# Altium PCB Copy of PCB1.PcbDoc
Units mil, origin at the board's own origin, x right, y up, seen from the top; angles counter-clockwise.
Board outline 3542.5 x 2310 mil, 2 copper layers (Top Layer, Bottom Layer); 13 components, 12 nets, 64 pads, 2 vias.
Unrouted connection lines stored in the file: 1.
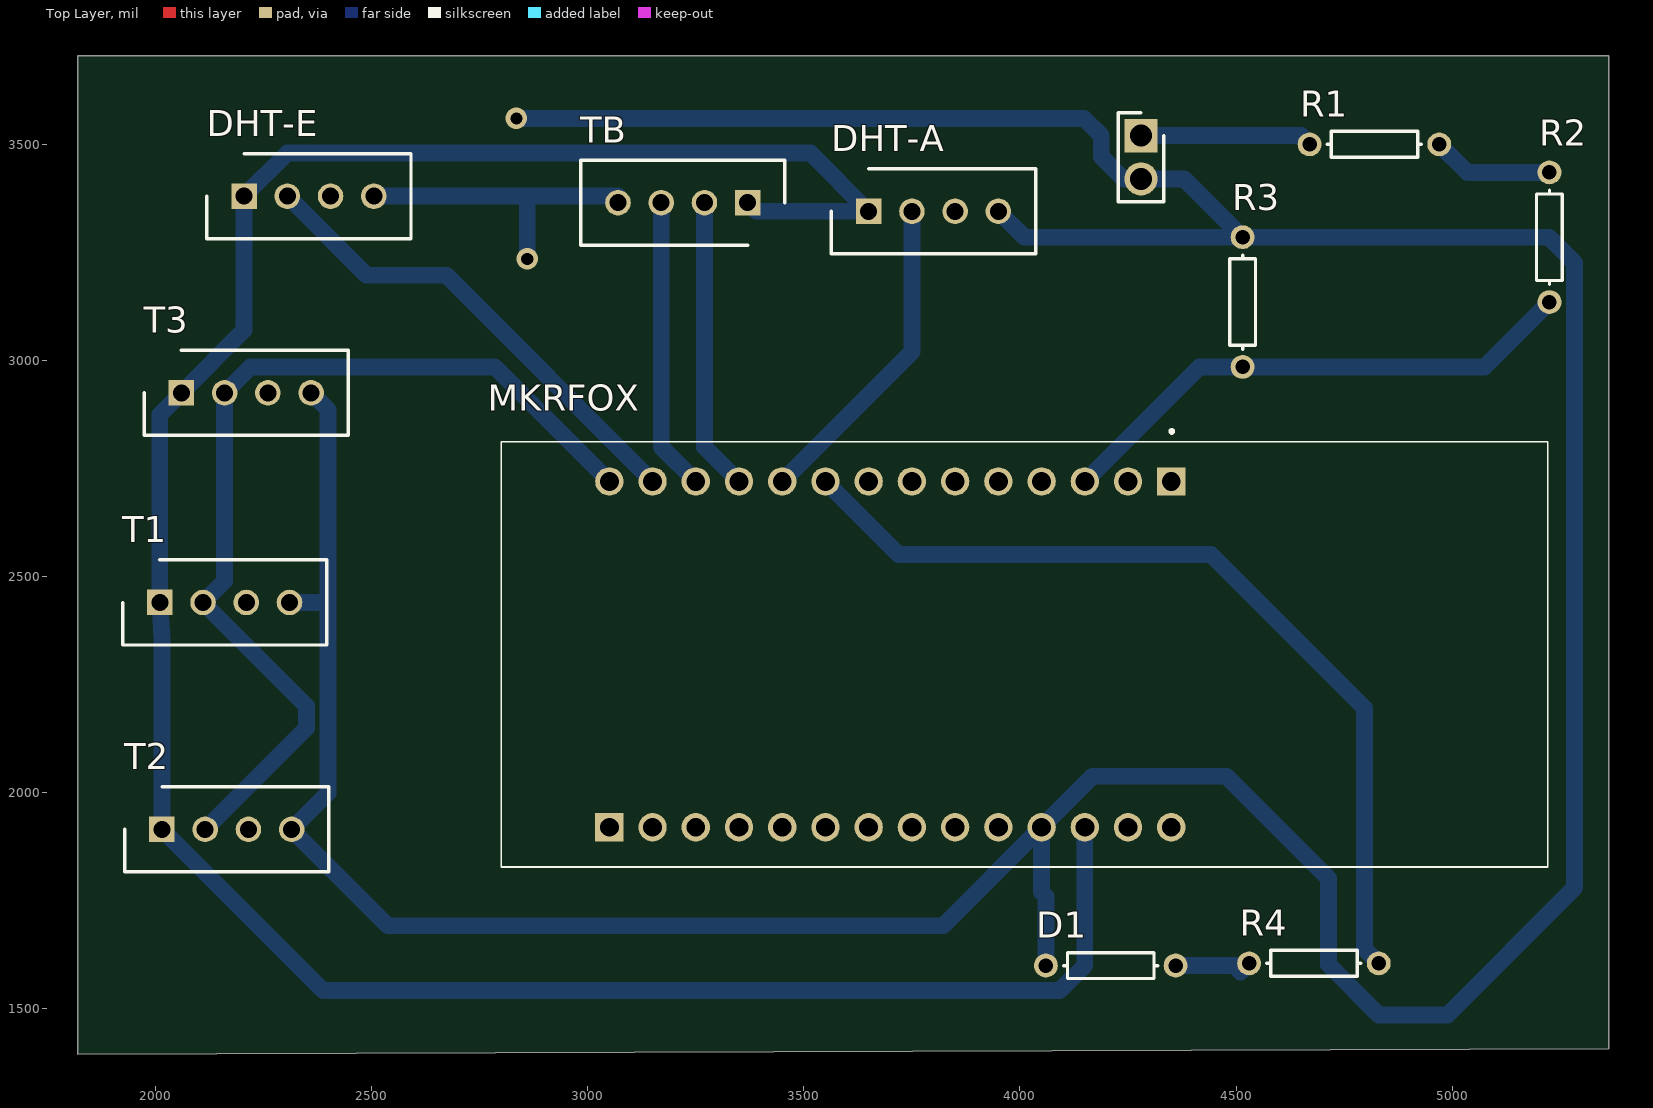
[diagram p0: Top Layer view]
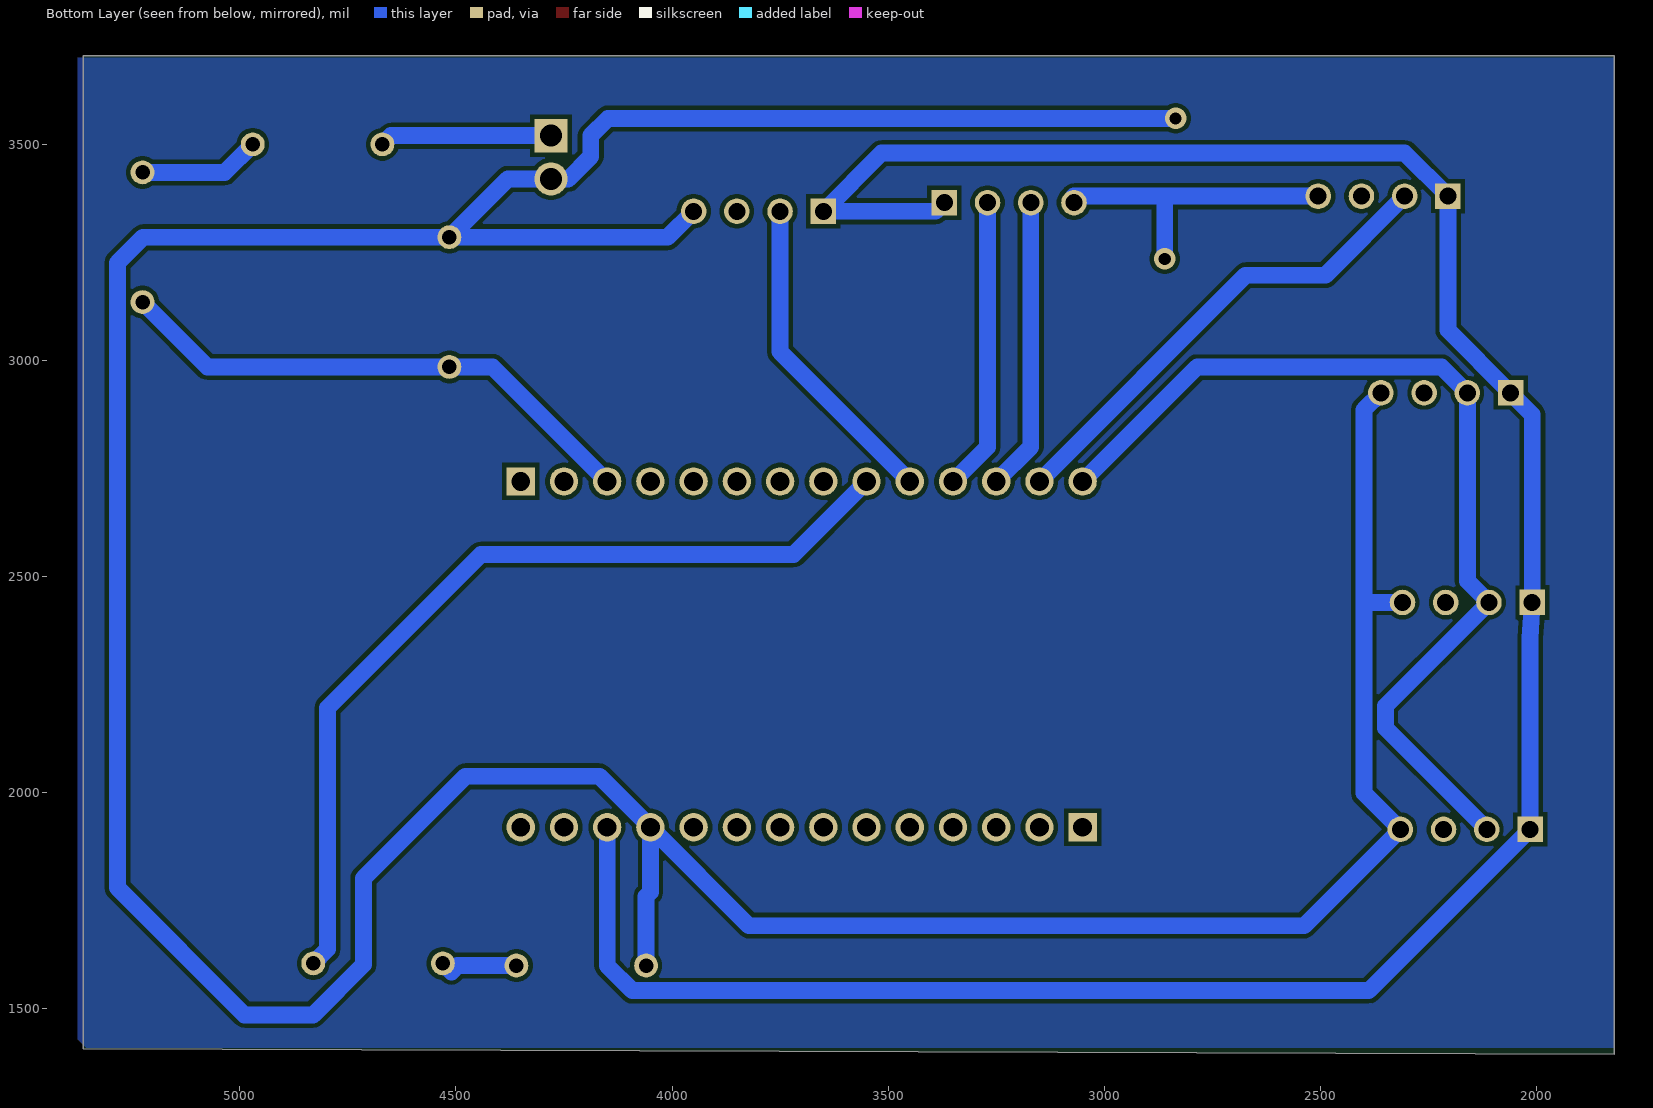
[diagram p1: Bottom Layer view, seen from below]

## Layer stack, top to bottom
Top Solder: solder mask 0.4, Solder Resist, Dk 3.5
Top Layer: signal copper 1.4
Dielectric 1: dielectric 12.6, FR-4, Dk 4.8
Bottom Layer: signal copper 1.4
Bottom Solder: solder mask 0.4, Solder Resist, Dk 3.5

## Board outline
1820,1395 5362.5,1407.5 5362.5,3705 1820,3705

## Design rules (kind name [scope] priority, off if disabled: settings)
Clearance [All] p1: gap=10 ignorepadtopadclearanceinfootprint=FALSE except(0: Arc-Hole Track-Hole SMDPad-Hole THPad-Hole Via-Hole Fill-Hole Poly-Hole Region-Hole Text-Hole)
PolygonConnect [All] p1: connectstyle=Relief reliefconductorwidth=10 reliefentries=4 polygonreliefangle="90 Angle" airgapwidth=10
RoomDefinition Schema-ruche-v1 [InComponentClass('Schema-ruche-v1')] p1: confinementstyle=ConfineIn formatcopy=TRUE lockcomponents=FALSE outline 1815,1400 5365,1400 5365,3700 1815,3700
RoutingLayers [All] p1: top layer_v5=FALSE bottom layer_v5=TRUE
RoutingVias [All] p1: holewidth=28 width=50 viastyle="Through Hole" minholewidth=28 minwidth=50 maxholewidth=28 maxwidth=50
SolderMaskExpansion [All] p1: expansion=4 istentingtop=FALSE
Width [All] p1: maxlimit=39.3 minlimit=10 preferedwidth=39 toplayer_maxwidth=10 toplayer_prefwidth=10 bottomlayer_minwidth=16 minimp=50.000000 maximp=50.000000 favimp=50.000000
29 further rules are at their usual default settings.

## Classes and differential pairs
component class Schema-ruche-v1: D1 DHT-A DHT-E MKRFOX R1 R2 R3 R4 T1 T2 T3 TB

## Components (designator, comment, footprint, x,y, rotation, side; value= is the part's Value field where it differs from the comment)
"Connector Battery" "61300211121" HDRV2W110P0X254_1X2_508X254X854P 4280,3520 r270 top
D1 "Res1" AXIAL-0.3 4210,1600 r0 top value=1K
DHT-A "101020011" HDRV4W80P0X254_1X4_1200X500X1550P 3650,3345 r0 top
DHT-E "101020011" HDRV4W80P0X254_1X4_1200X500X1550P 2205,3380 r0 top
MKRFOX "ABX00012" ABX00012 4010.63,2320 r180 top
R1 "Res1" AXIAL-0.3 4820,3500 r180 top value=1K
R2 "Res1" AXIAL-0.3 5225,3285 r90 top value=1K
R3 "Res1" AXIAL-0.3 4515,3135 r270 top value=1K
R4 "Res1" AXIAL-0.3 4680,1605 r180 top value=1K
T1 "101020011" HDRV4W80P0X254_1X4_1200X500X1550P 2010,2440 r0 top
T2 "101020011" HDRV4W80P0X254_1X4_1200X500X1550P 2015,1915 r0 top
T3 "101020011" HDRV4W80P0X254_1X4_1200X500X1550P 2060,2925 r0 top
TB "101020011" HDRV4W80P0X254_1X4_1200X500X1550P 3370,3365 r180 top

## Footprints (in the part's own frame and the unit in brackets; to place one, negate y for a bottom-side part, rotate by r counter-clockwise, add the part's x,y. Pads: shape width x height; smd on the part's side, far side on the other; paste and mask are expansions set on the pad)
ABX00012 [mm]
  rect 1.665x1.665 hole 1.11: 1(-8.62,-10.16) 15(24.4,10.16)
  round 1.665 hole 1.11: 2(-6.08,-10.16) 3(-3.54,-10.16) 4(-1,-10.16) 5(1.54,-10.16) 6(4.08,-10.16) 7(6.62,-10.16) 8(9.16,-10.16) 9(11.7,-10.16) 10(14.24,-10.16) 11(16.78,-10.16) 12(19.32,-10.16) 13(21.86,-10.16) 14(24.4,-10.16) 16(21.86,10.16) 17(19.32,10.16) 18(16.78,10.16) 19(14.24,10.16) 20(11.7,10.16) 21(9.16,10.16) 22(6.62,10.16) 23(4.08,10.16) 24(1.54,10.16) 25(-1,10.16) 26(-3.54,10.16) 27(-6.08,10.16) 28(-8.62,10.16)
  silkscreen extent -30.75,-13.2 30.75,12.5, body extent -30.75,-12.5 30.75,12.5, height 10.1
AXIAL-0.3 [mm] "Axial Device, Thru-Hole; 2 Leads; 0.3 in Pin Spacing"
  round 1.4 hole 0.85: 1(-3.81,0) 2(3.81,0)
  silkscreen extent -2.77,-0.76 2.77,0.76
HDRV2W110P0X254_1X2_508X254X854P [mm]
  rect 1.95x1.95 hole 1.3: 1(0,0)
  round 1.95 hole 1.3: 2(2.54,0)
  silkscreen extent -1.34,-1.34 3.88,1.34, body extent -1.27,-1.27 3.81,1.27, height 8.54
HDRV4W80P0X254_1X4_1200X500X1550P [mm]
  rect 1.5x1.5 hole 1: 1(0,0)
  round 1.5 hole 1: 2(2.54,0) 3(5.08,0) 4(7.62,0)
  silkscreen extent -2.19,-2.5 9.81,2.5

## Part data
"Connector Battery": "Connector", Manufacturer_Name="Wurth Elektronik", Mouser Part Number=710-61300211121, Datasheet Link=https://componentsearchengine.com/Datasheets/2/61300211121.pdf, Height=8.54mm, Manufacturer_Part_Number=61300211121, Mouser Price/Stock=https://www.mouser.co.uk/ProductDetail/Wurth-Elektronik/61300211121?qs=t4813l51qx%252B1A5GYDQxPlw%3D%3D
D1 R1 R2 R3 R4: "Resistor", LatestRevisionDate=17-Jul-2002, LatestRevisionNote="Re-released for DXP Platform.", PackageDescription="Axial Device, Thru-Hole; 2 Leads; 0.3 in Pin Spacing", PackageReference=AXIAL-0.3, Published=8-Jun-2000, Publisher="Altium Limited"
DHT-A DHT-E T1 T2 T3 TB: "Integrated Circuit", Manufacturer_Name="Seeed Studio", Mouser Part Number=713-101020011, Arrow Part Number=101020011, Arrow Price/Stock=https://www.arrow.com/en/products/101020011/seeed-technology-limited, Datasheet Link=https://componentsearchengine.com/Datasheets/1/101020011.pdf, Height=15.5mm, Manufacturer_Part_Number=101020011, Mouser Price/Stock=https://www.mouser.co.uk/ProductDetail/Seeed-Studio/101020011?qs=1%252B9yuXKSi8Dq%252B99bte6U5Q%3D%3D
MKRFOX: "Undefined or Miscellaneous", Manufacturer_Name=Arduino, Mouser Part Number=782-ABX00012, Arrow Part Number=ABX00012, Arrow Price/Stock=https://www.arrow.com/en/products/abx00012/arduino-corporation?region=nac, Datasheet Link=http://media.digikey.com/pdf/Data%20Sheets/Arduino%20PDFs/ABX00012_Web.pdf, Height=10mm, Manufacturer_Part_Number=ABX00012, Mouser Price/Stock=https://www.mouser.co.uk/ProductDetail/Arduino/ABX00012?qs=5aG0NVq1C4yoL%2F5lAzCrfA%3D%3D

## Via types
v1: diameter 50, hole 28, Top Layer to Bottom Layer, 2 vias

## Nets (pads, with @x,y where several pads share a name; then routed paths per layer and width w, separated by ;. In a path a pad name is that pad's centre, name@x,y a point inside that pad or via, vN(x,y) a via of type N, cw(c..) or ccw(c..) an arc to the next point about the centre after c; other vN are vias at no path point)
+Battery: "Connector Battery.1" R1.2 | length 398.3
  Bottom Layer w39: 4280,3520 4650,3520 R1.2
Bal-CLK: MKRFOX.12 TB.3 | length 678.1
  Bottom Layer w39: TB.3 3170,2800 MKRFOX.12
Bal-DATA: MKRFOX.11 TB.2 | length 678.1
  Bottom Layer w39: TB.2 3270,2800 MKRFOX.11
DHT-A: DHT-A.2 MKRFOX.10 | length 749.3
  Bottom Layer w39: MKRFOX.10 3750,3020 DHT-A.2
DHT-E: DHT-E.2 MKRFOX.13 | length 1118.4
  Bottom Layer w39: DHT-E.2 2488,3197 2673,3197 MKRFOX.13
GND: "Connector Battery.2" D1.1 DHT-A.4 DHT-E.4 MKRFOX.25 R3.1 T1.4 T2.4 T3.4 TB.4 | length 10515.7
  Bottom Layer w39: T1.4 2399,2440 ; T3.4 2399,2886 2399,2440 ; DHT-E.4 2860,3380 ; v1@2840,3560 4148,3560 4188,3520 4188,3472 4240,3420 4280,3420 4380,3420 R3.1 ; v1(2860,3235) 2860,3380 ; TB.4 3070,3380 2860,3380 ; DHT-A.4 4010,3285 R3.1 ; D1.1 4060,1760 4050,1770 MKRFOX.25 ; 2399,2440 2399,1999 T2.4 2538,1692 3822,1692 MKRFOX.25 ; MKRFOX.25 4168,2038 4478,2038 4714,1802 4714,1602 4830,1486 4989,1486 5283,1780 5283,3226 5224,3285 R3.1
  other v1: 2835,3560
Led_pow: MKRFOX.9 R4.1 | length 2068.7
  Bottom Layer w39: MKRFOX.9 3719,2551 4442,2551 4797,2196 4797,1638 R4.1
NetD1_2: D1.2 R4.2 | length 184.1
  Bottom Layer w39: D1.2 4496,1600 4510.5,1585.5 R4.2
NetR1_1: R1.1 R2.2 | length 281.9
  Bottom Layer w39: R1.1 5035,3435 R2.2
oneWire: MKRFOX.14 T1.2 T2.2 T3.2 | length 2251.5
  Bottom Layer w39: T2.2 2349.29,2149.29 2349.29,2200.71 T1.2 2160,2490 T3.2 2220,2985 2785,2985 MKRFOX.14
Sensor-Battery: MKRFOX.3 R2.1 R3.2 | length 1246.9
  Bottom Layer w39: MKRFOX.3 4415,2985 R3.2 5075,2985 R2.1
VCC: DHT-A.1 DHT-E.1 MKRFOX.26 T1.1 T2.1 T3.1 TB.1 | length 6010.1
  Bottom Layer w39: TB.1 3390,3345 DHT-A.1 3515,3480 2305,3480 DHT-E.1 2205,3070 T3.1 2010,2875 T1.1 2015,2357 T2.1 2388,1542 4092,1542 4150,1600 MKRFOX.26
pads on no net: DHT-A.3 DHT-E.3 MKRFOX.1 MKRFOX.2 MKRFOX.4 MKRFOX.5 MKRFOX.6 MKRFOX.7 MKRFOX.8 MKRFOX.15 MKRFOX.16 MKRFOX.17 MKRFOX.18 MKRFOX.19 MKRFOX.20 MKRFOX.21 MKRFOX.22 MKRFOX.23 MKRFOX.24 MKRFOX.27 MKRFOX.28 T1.3 T2.3 T3.3

## Polygon pours and split planes (outlines as drawn)
no net on Bottom Layer "NONET_L02_P000" (solid, pour order 0): 1820,3700 5375,3700 5375,1430 5355,1410 1820,1410